# EAGLE board Apo Board 2017_PT (EAGLE 7.7.0)

Size 96.52 x 62.23 mm. Coordinates in mm from the lower left corner, seen from the top.
Outline: 29.21,0 96.52,0 96.52,62.23 0,62.23 0,0 29.21,0
Outline: 29.21,0 29.21,9.13
Outline: 5.26,31.8 arc-127 91.24,31.8 arc-127 5.26,31.8
Copper layers (1*16): Top 0.035mm / dielectric 1.5mm / Bottom 0.035mm
Design rules "SparkFun-2-layer-TIGHT": minimum track width 7mil, minimum drill 15mil, track to track 7mil, track to pad 7mil, pad to pad 7mil, via to via 7mil, smd to smd 7mil, copper to edge 7mil, drill to drill 7mil, minimum pad ring 7mil, minimum via ring 7mil, stop-mask expansion 4mil, vias tented up to drill 25mil, thermal gap 10mil
Net classes: 0 default: width 0.152 mm, drill 0.305 mm, clearance 0.152 mm; 1 vcc: width 0.254 mm; 3 ButtonSignal: width 0.254 mm

## Footprints (pad centres in the part's own frame; a part is rotated, then mirrored left to right if it is on the bottom)
STAND-OFF = hole 3.302: 0,0

## Placement (x,y rotation side)
FRAME1  FRAME-LETTER  [CREATIVE_COMMONS]  21.59,-16.51 0 top  (outside the outline)
H2  STAND-OFF  [STAND-OFF]  3.81,58.42 0 top
H3  STAND-OFF  [STAND-OFF]  92.71,58.42 0 top
H4  STAND-OFF  [STAND-OFF]  92.71,3.81 0 top
H5  STAND-OFF  [STAND-OFF]  3.81,3.81 0 top

## Library data of the parts
FRAME1 = SparkFun-Aesthetics
H2-H5 = SparkFun-Hardware

## Text on the board
tValues: Joel Bartlett